# Altium PCB nfc-epd.PcbDoc (part 2 of 2)
Units mil, origin at the board's own origin, x right, y up, seen from the top; angles counter-clockwise.
Board outline 3332.68 x 2086.61 mil, 4 copper layers (Top Layer, Groud Plane, Signal 1, Bottom Layer); 142 components, 114 nets, 463 pads, 109 vias.
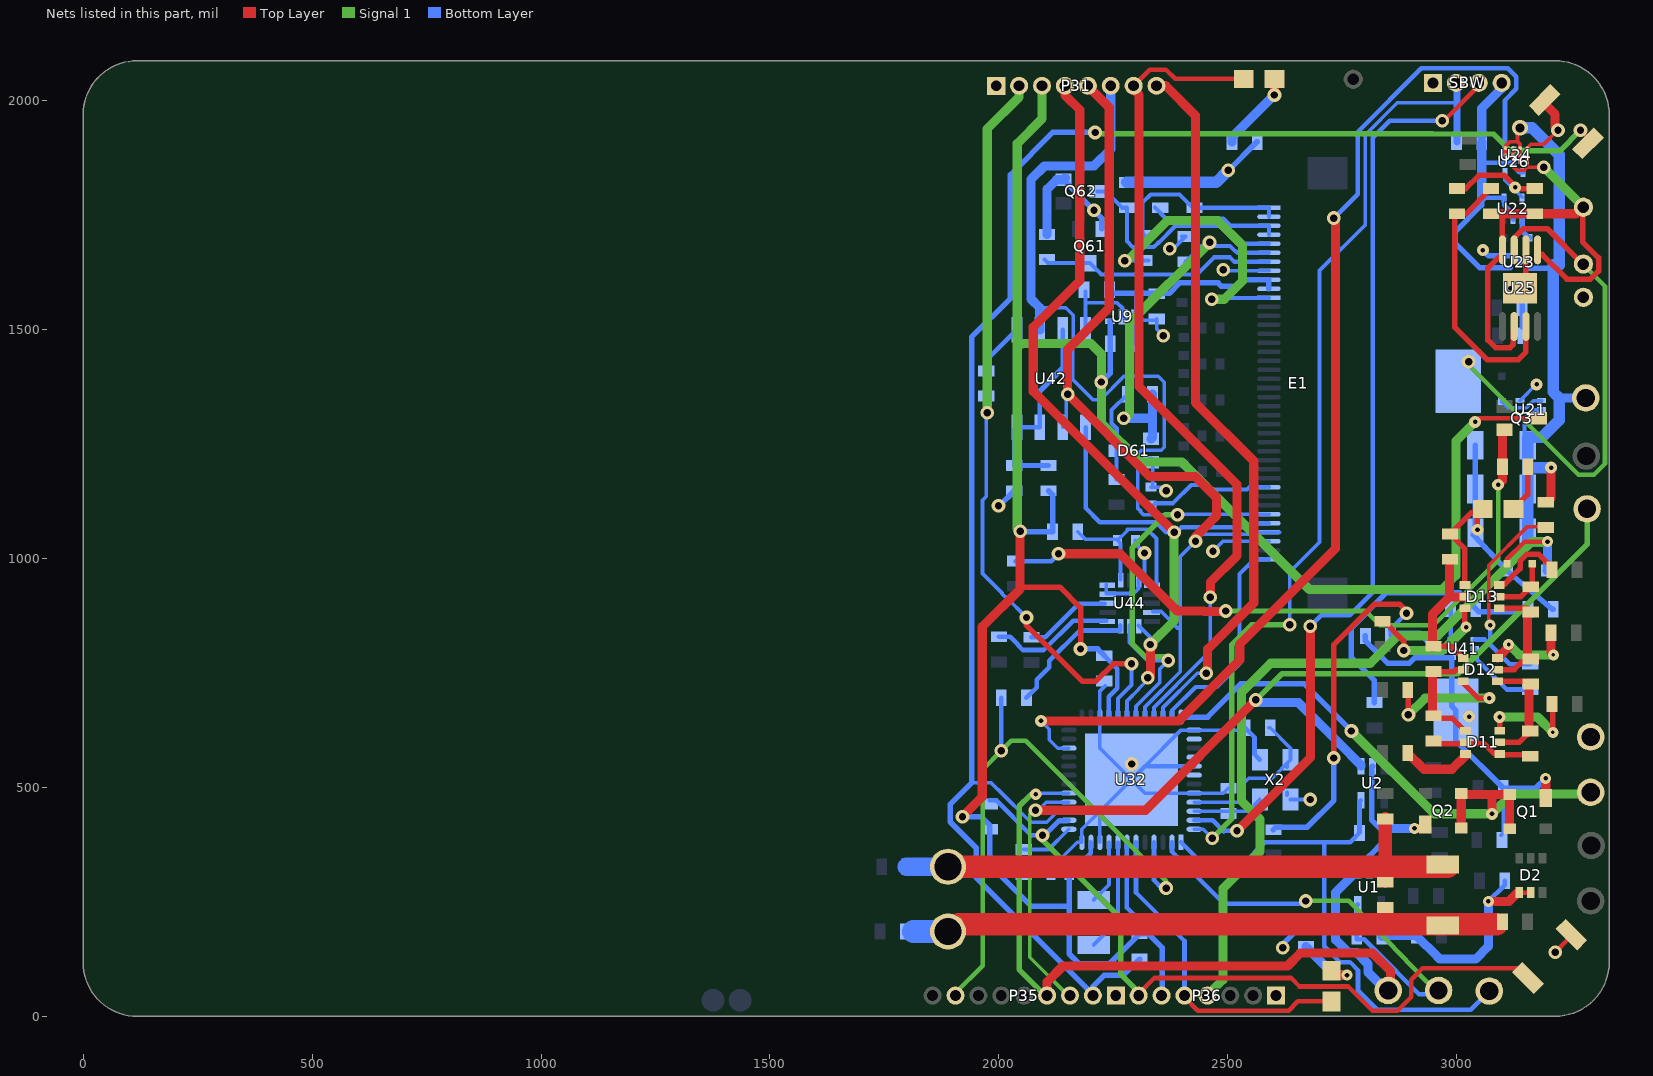
[diagram p4: the nets of this part, all layers, seen from the top]

## Via types
v1: diameter 30, hole 16, Top Layer to Bottom Layer, tented both sides, 74 vias
v2: diameter 26, hole 10, Top Layer to Bottom Layer, tented both sides, 21 vias
v3: diameter 24, hole 10, Top Layer to Bottom Layer, tented both sides, 7 vias
v4: diameter 24, hole 8, Top Layer to Bottom Layer, tented both sides, 3 vias
v5: diameter 50, hole 28, Top Layer to Bottom Layer, tented both sides, 3 vias
v6: diameter 34, hole 20, Top Layer to Bottom Layer, tented both sides, 1 vias

## Nets (pads, with @x,y where several pads share a name; then routed paths per layer and width w, separated by ;. In a path a pad name is that pad's centre, name@x,y a point inside that pad or via, vN(x,y) a via of type N, cw(c..) or ccw(c..) an arc to the next point about the centre after c; other vN are vias at no path point) (continued)
GND: B1.2 C6.2 C7.2 C8.2 C10.2 C20.1 C21.1 C22.1 C23.1 C24.1 C31.1 C32.2 C33.2 C34.1 C36.1 C41.1 C42.2 C61.2 C72.1 C73.1 C74.1 C75.1 C76.1 C78.1 C79.1 Cns3.1 D2.1 D2.2 D13.1 D24.2 D61.2 E1.3 E1.33 ESD1.1 GND0.0 GND1.0 P31.1 P35.1 P36.1 Q1.1 Q2.1 Q61.2 Q62.2 R2.2 R9.2 R21.1 R34.1 R35.1 R41.1 R44.1 R70.1 Rz23.2 S1.2 S2.2 SBW.1 U1.2 U2.2 U9.2 U9.5 U21.5 U22.5 U23.2 U23.5 U24.C1 U25.6 U25.9 U26.5 U32.0 U32.10 U32.12 U32.27 U32.37 U32.41 U32.44 U41.1 U42.4 U44.12 U44.13 U44.16 X2.2 X2.4 | length 6370.8
  Top Layer w8: U24.C1@3153.62,1895.75 3162.54,1904.67 3190,1904.67 3220.33,1935 v1(3220.94,1935) ; S2.2@3201.69,2001.07 S2.2@3201.69,2007.96
  Top Layer w10: D2.1@3135.83,270.22 D2.2@3161.42,270.22 ; v1(3214.57,140) 3244.57,170 3241.85,170 S1.2@3250.08,178.23
  Top Layer w12: Rz23.2@3000,1807.56 3019.24,1807.56 3048.1,1836.43 3103.57,1836.43 3132.44,1807.56 C24.1@3170,1807.56 ; D13.1@3017.72,941.93 3017.72,1020.26 Cns3.1@2984.83,1053.15 3031.68,1100 3048.47,1100 D24.2@3056.54,1108.06 ; v2(3045,1062.54) D24.2@3045,1090.55 ; U25.9@3137.87,1590 3150.67,1602.8 U25.6@3150.67,1673.66
  Top Layer w20: v3(2907.48,410.43) 2921.77,410.43 Q2.1@2930.63,419.29 ; v3(3068.9,250.98) 3113.76,250.98 D2.1@3132.46,269.69 ; S2.2@3191.85,2001.07 3191.85,1992.72 3214.57,1970 3214.57,1941.37 v1(3220.94,1935) ; Q1.1@3193.9,476.38 v3(3193.9,519.69)
  Bottom Layer w8: C32.2@2054.13,309.06 C36.1@2114.17,309.06 2114.17,322.82 2171.27,379.92 U32.12@2181.1,379.92 2181.1,408.46 U32.0@2220.47,447.83 ; U42.4@2189.17,1499.02 2189.17,1560 ; C78.1@2189.17,1583.46 2189.17,1560 ; U32.10@2220.47,379.92 U32.0@2220.47,447.83 ; C31.1@2231.47,721.46 2220.47,710.46 U32.27@2220.47,653.54 2220.47,585.63 U32.0@2289.37,516.73 ; U44.13@2234.25,942.91 2234.25,923.23 2294.1,923.23 2304.69,933.81 2304.69,953.74 2317.91,966.97 v1(2317.91,1011.81) 2298.23,1031.5 C42.2@2298.23,1039.37 ; C79.1@2298.23,1468.5 2298.23,1516.73 U9.2@2299.21,1517.72 ; U32.0@2318.9,546.26 2397.64,625 U32.37@2426.18,625 ; C61.2@2332.02,1155.51 C61.2@2335.63,1155.51 ; D61.2@2332.02,1218.43 D61.2@2332.02,1209.65 2335.63,1206.04 C61.2@2335.63,1155.51 ; R70.1@2344.49,1522.64 R70.1@2344.49,1519.69 ; v1(2359.06,1486.22) 2344.49,1500.79 R70.1@2344.49,1519.69 ; v1(2365,1147.64) 2357.13,1155.51 C61.2@2335.63,1155.51 ; v1@2374.02,1670.28 2375,1670.28 C74.1@2407.48,1702.76 C74.1@2399.61,1702.76 ; U32.37@2427.17,625 C34.1@2538.39,625 ; v1(2467.52,1015.75) 2489.17,1037.4 E1.3@2589.57,1037.4 ; C33.2@2500.98,498.03 2490.16,487.2 U32.44@2426.18,487.2 2318.9,487.2 U32.0@2289.37,516.73 ; v1@2501.48,1846.95 R34.1@2563.98,1909.45 ; v1@2502.95,1627.95 E1.33@2589.57,1627.95 ; X2.4@2628.94,483.27 X2.4@2628.94,489.54 ; X2.4@2636.81,473.43 v1(2680,473.43) ; R2.2@3096.46,395.67 3101.38,400.59 C6.2@3101.38,498.03 ; 3105,1832.76 3105,1825.85 U22.5@3142.54,1788.31 ; U21.5@3137.79,1344.49 3173.31,1380 v2(3174.21,1380) ; 2189.17,1560 2191.28,1557.9 2257.51,1557.9 2257.94,1558.32 2270.67,1545.59 U9.5@2270.67,1527.56 2278.54,1519.69 R70.1@2344.49,1519.69 ; U32.0@2220.47,447.83 U32.0@2289.37,516.73
  Bottom Layer w10: U32.0@2289.37,516.73 2318.9,546.26 U32.41@2426.18,546.26 ; C34.1@2537.4,629.92 2558.07,609.25 2558.07,571.85 X2.2@2569.88,560.04 ; v3(3068.9,250.98) 3104.33,286.42 R9.2@3104.33,296.26
  Bottom Layer w12: v1(1999.02,1115) 2000.83,1115 C41.1@2033.46,1147.64 ; Q62.2@2140.75,1826.77 2224.41,1743.11 Q61.2@2224.41,1719.49 ; v1(2500.98,1847.44) 2562.99,1909.45 R34.1@2563.98,1909.45 ; v1(2620,150) 2620,157.4 R35.1@2670.28,207.68 ; R41.1@2800.2,830.71 2800.2,819.88 2849.44,770.64 2895.48,770.64 2908.31,783.46 U41.1@2988.66,783.46 2988.66,677.68 B1.2@2998.03,668.31 2998.03,601.38 C6.2@3101.38,498.03 3172.24,498.03 v3(3193.9,519.69) ; U1.2@2809.06,318.9 2809.06,350.39 2842.52,383.86 C8.2@2842.52,400.59 2813.98,429.13 2813.98,544.29 U2.2@2815.94,546.26 ; C23.1@3040.35,1247.05 C22.1@3040.35,1151.57 C21.1@3040.35,1056.42 ; C21.1@3040.67,1056.1 C21.1@3040.35,1056.42 ; v2(3056.73,1673.23) 3069.53,1660.43 U23.2@3116.23,1660.43 3123.12,1660.43 U23.5@3135.91,1647.64 ; v2(3116.22,1590) v2@3116.22,1597.03 ; 3142.72,1505.91 3142.72,1573.19 v2(3159.53,1590) ; R44.1@3210.63,888.78 3207.99,888.78 3110,972.58 3036.19,1051.28 3045.88,1061.6 v2(3045,1062.54) C21.1@3040.35,1056.42
  Bottom Layer w20: C73.1@2105.12,1707.56 2105.12,1805.98 2125.91,1826.77 Q62.2@2140.75,1826.77 Q62.2@2144.94,1830.96 ; C7.2@2836.61,174.21 2838.58,176.18 C10.2@2911.42,176.18 2957.85,129.75 2962.6,125 3040.98,125 3068.9,152.92 v3(3068.9,250.98) ; C8.2@2842.52,400.59 2852.36,410.43 v3(2907.48,410.43)
  Bottom Layer w25: C75.1@2279.53,1820.87 C76.1@2352.36,1820.87 C72.1@2427.17,1820.87 2474.41,1820.87 v1(2500.98,1847.44)
  other v1: 2290,550.94 2490,1630 2372.81,1676.4 2207.52,1760
  other v2: 3026.57,654.53 3127.03,1810
LDOO: U32.42
LED1: D31.1 P31.7 U32.33 | length 1810.5
  Top Layer w10: P31.7@2294.09,2032.01 2329.31,2067.23 2364.71,2067.23 2384.7,2047.24 D31.1@2534.45,2047.24
  Top Layer w20: P31.7@2294.09,2032.01 2294.09,2023.82 2306,2011.91 2306,1375 2520,1161 2520,1006.23 2461.61,947.84 v1(2461.61,915.35)
  Bottom Layer w8: U32.33@2338.58,653.54 2338.58,674.52 2438.06,774 2438.13,774 2461.61,797.48 v1(2461.61,915.35)
LED2: D32.1 P36.5 U32.6 | length 729.1
  Top Layer w10: P36.5@2405.12,41.34 2433.91,12.55 2632.67,12.55 2652.6,32.48 D32.1@2726.38,32.48
  Bottom Layer w10: U32.6@2299.21,379.92 2299.21,270.39 2405.12,164.49 P36.5@2405.12,41.34
  Bottom Layer w12: P36.5@2405.12,41.34 P36.5@2410.31,41.34
NetC1_1: C1.1 C2.1 CV1.1 Rz_P.2 SMA1.1 | length 1319.5
  Top Layer w25: C1.1@2843.5,292.56 2843.5,326.61
  Top Layer w30: 2843.5,326.61 C2.1@2843.5,431.1
  Top Layer w50: SMA1.1@1888.78,326.61 2843.5,326.61 CV1.1@2980,326.61
  Bottom Layer w40: Rz_P.2@1799.01,326.61 SMA1.1@1888.78,326.61
NetC1_2: C1.2 C3.1 CV1.2 Rz_N.2 SMA1.2 | length 1330.7
  Top Layer w25: 2841.55,201.05 2841.55,235.48 C1.2@2843.5,237.44
  Top Layer w50: SMA1.2@1888.78,185.2 1895.2,185.2 1911.05,201.05 2841.55,201.05 3086.95,201.05
  Bottom Layer w50: 1813.15,185.2 SMA1.2@1888.78,185.2 SMA1.2@1879.51,194.46
NetC42_1: C42.1 Rz46.2 U44.1 U44.14 | length 391.8
  Bottom Layer w8: Rz46.2@2172.24,1058.07 2188.23,1042.09 2256.14,1042.09 C42.1@2258.86,1039.37 ; U44.14@2265.31,953.74 2265.31,1032.91 C42.1@2258.86,1039.37 ; U44.1@2343.91,938.98 2343.91,1043.17 2323.79,1063.3 2280,1063.3 2280,1060.51 C42.1@2258.86,1039.37
NetC77_2: C77.2 D61.3 Rz70.2 | length 205
  Bottom Layer w9: C77.2@2256.89,1172.24 2256.89,1234.91 D61.3@2257.22,1235.24 2257.22,1284.05 2246.14,1295.13 2246.14,1323.89 Rz70.2@2280.51,1358.27
NetCn1_2: Cn1.2 D11.6 | length 222.4
  Top Layer w12: D11.6@3093.5,624.02 v2(3093.5,653.54) ; Cn1.2@3207.68,682.09 3209.57,680.2 v4(3209.57,620)
  Signal 1 w20: v2(3093.5,653.54) 3176.02,653.54 v4(3209.57,620)
NetCn2_2: Cn2.2 D12.6 | length 196.8
  Top Layer w20: D12.6@3088.58,782.48 3113.19,807.09 v4(3113.19,812.01) ; Cn2.2@3205.63,837.6 3205.63,794.37 v4(3210.63,789.37)
  Signal 1 w20: v4(3113.19,812.01) 3135.83,789.37 v4(3210.63,789.37)
NetCn3_2: Cn3.2 D13.6 | length 171.6
  Top Layer w12: D13.6@3092.52,941.93 3102.36,941.93 3137.87,977.44 3137.87,994.41 3152.32,1008.86 3179.13,1008.86 Cn3.2@3212.6,975.39
NetCns1_1: Cns1.1 Cns2.2 D11.1 D12.2 | length 209.5
  Top Layer w12: Cns2.2@2948.82,752.95 2994.09,752.95 2998.03,756.89 D12.2@3013.78,756.89 ; Cns1.1@2959.65,650.59 2990.16,650.59 D11.1@3016.73,624.02
  Top Layer w20: Cns1.1@2946.85,663.39 2946.85,738.19
NetCns1_2: Cns1.2 Cps1.2 D11.2 D11.4 | length 207.3
  Top Layer w12: Cns1.2@2946.85,595.47 3059.06,595.47 3081.69,572.83 3097.19,570.87 Cps1.2@3144.69,570.87
NetCns2_1: Cns2.1 Cns3.2 D12.1 D13.2 | length 300.4
  Top Layer w12: Cns2.1@2948.82,808.07 2988.19,808.07 D12.1@3013.78,782.48
  Top Layer w20: Cns2.1@2946.85,805.12 2946.85,877.95 2984.83,915.93 D13.2@3017.72,915.93 ; 2984.25,915.35 2984.25,980.81
NetCp1_1: Cp1.1 D11.3 | length 151.5
  Top Layer w20: Cp1.1@2892.72,574.8 2928.13,539.39 2989.19,539.39 D11.3@3017.72,567.91
NetCp2_1: Cp2.1 D12.3 | length 312.6
  Top Layer w12: v1(2894.12,658.46) 2894.12,705.15 Cp2.1@2894.69,705.71 ; D12.3@3011.81,729.33 3046.26,694.88 v2(3070.87,694.88)
  Signal 1 w20: v1(2894.12,658.46) 2930.54,694.88 v2(3070.87,694.88)
NetCp3_1: Cp3.1 D13.3 | length 290.8
  Top Layer w12: Cp3.1@2831.69,864.17 2839.57,864.17 2883.89,819.85 v1(2883.89,798.64) ; D13.3@3017.72,890.75 3017.72,852.28 v3(3020,850)
  Signal 1 w20: v1(2883.89,798.64) 2968.64,798.64 v3(3020,850)
NetCps1_1: Cps1.1 Cps2.2 D11.5 D12.4 | length 253.8
  Top Layer w12: D12.4@3088.58,731.3 3155.51,731.3 Cps2.2@3161.42,725.39 ; D11.5@3093.5,598.43 3135.83,598.43 3157.48,620.08 Cps1.1@3160.43,623.03
  Top Layer w20: Cps1.1@3157.48,620.08 Cps2.2@3157.48,721.46
NetCps2_1: Cps2.1 Cps3.2 D12.5 D13.4 | length 251.2
  Top Layer w12: D12.5@3088.58,756.89 3125,756.89 3142.72,774.61 3155.51,774.61 Cps2.1@3161.42,780.51 ; D13.4@3092.52,890.75 3153.54,890.75 Cps3.2@3161.42,882.87
  Top Layer w20: Cps2.1@3154.53,779.53 Cps3.2@3154.53,875.98
NetCps3_1: Cps3.1 D3.1 D13.5 | length 129.3
  Top Layer w12: D13.5@3092.52,916.34 3139.76,916.34 Cps3.1@3161.42,937.99 3164.37,940.94 D3.1@3164.37,988.19
NetD21_1: D21.1 U21.1 | length 99.5
  Bottom Layer w8: D21.1@3097.83,1342.44 3097.83,1342.13 3110.8,1329.16 3123.63,1329.16 3123.81,1328.98 3151.78,1328.98 3157.64,1334.83 3157.64,1335.02 3161.42,1338.8 3161.61,1338.8 3167.29,1344.49 U21.1@3185.04,1344.49
NetD22_1: D22.1 U22.1 | length 46.2
  Bottom Layer w12: U22.1@3142.54,1740 3142.54,1715.02 D22.1@3157.56,1700
NetD24_1: D24.1 R24.2 | length 122.7
  Top Layer w12: D24.1@3123.46,1100 D24.1@3123.46,1117.9 ; D24.1@3123.46,1108.06 3154.59,1139.19 R24.2@3154.59,1200
NetD31_2: D31.2 R34.2 | length 176.2
  Top Layer w20: D31.2@2601.38,2047.24 2601.38,2012.04 v1(2601.5,2011.91)
  Bottom Layer w20: R34.2@2508.86,1909.45 2508.86,1919.26 v1(2601.5,2011.91)
NetD32_2: D32.2 R35.2 | length 153.2
  Top Layer w20: D32.2@2726.38,99.41 2735.79,90 v3(2760,90)
  Bottom Layer w20: R35.2@2670.28,152.56 2732.83,90 v3(2760,90)
NetQ3_2: Q3.2 R24.1 Rz22.2 | length 1476
  Top Layer w20: v1(2130,1010) 2264.46,1010 2389.46,885 2448.13,885 2448.77,884.35 2494.35,884.35 v1(2495,885) ; v2(3090.09,1160.69) 3099.48,1170.08 R24.1@3099.48,1200 3099.48,1276.06 Q3.2@3103.93,1280.51
  Signal 1 w10: v1(2495,885) 2801.13,885 2832.13,854 2949,854 3084.13,989.13 3090.09,995.09 v2(3090.09,1160.69)
  Bottom Layer w10: Rz22.2@2035.43,994.09 2114.09,994.09 v1(2130,1010)
NetR41_2: R41.2 Rz40.1 U41.2 | length 926.1
  Top Layer w12: v1(2731.3,563.98) 2731.3,811.69 2819.61,900 2874.61,900 2890,884.61 v1(2890,880)
  Bottom Layer w10: R41.2@2860.65,836.04 R41.2@2855.31,830.71 2855.31,843.5 2855.31,845.31 v1(2890,880) ; U41.2@2982.28,803.15 U41.2@2988.66,803.15
  Bottom Layer w12: Rz40.1@2599.41,407.48 2605.31,413.39 2673.23,413.39 2731.3,471.46 v1(2731.3,563.98) ; R41.2@2855.31,843.5 2862.78,836.04 2918.88,836.04 2951.77,803.15 U41.2@2982.28,803.15
NetR43_1: R43.1 R44.2 Rz41.2 | length 620.6
  Bottom Layer w12: Rz41.2@2819.88,685.04 2819.88,733.4 2769.69,783.6 2769.69,848.11 2846.58,925 3006.1,925 R43.1@3041.34,889.76 3047.24,883.86 3150.59,883.86 R44.2@3155.51,888.78
NetRz21_1: Rz21.1 Rz23.1 U25.3 | length 597.5
  Top Layer w12: Rz21.1@3074.72,1807.56 3019.61,1752.44 2995,1752.44 2995,1505 3065.82,1434.18 3134.18,1434.18 3150.67,1450.67 U25.3@3150.67,1506.34
NetRz45_2: Rz45.2 U42.1 | length 117.2
  Bottom Layer w10: Rz45.2@1972.44,1409.45 1972.44,1432.28 U42.1@2039.17,1499.02
NetRz47_2: Rz47.2 U44.8 | length 294.7
  Bottom Layer w10: Rz47.2@2060.04,695.87 2082.27,718.09 2082.27,734.6 2110,762.34 2110,776.34 2176.18,842.52 2265.31,842.52 U44.8@2265.31,853.35
NetRz48_1: Rz48.1 U44.9 | length 273.6
  Bottom Layer w10: Rz48.1@2000,828.74 2024.8,828.74 2041.15,812.39 2041.15,810.97 2052.12,800 2098.23,800 2162.4,864.17 U44.9@2234.25,864.17
NetRz49_1: Rz49.1 U44.11 | length 190.8
  Bottom Layer w10: Rz49.1@2070.87,827.76 2100.98,827.76 2173.99,900.76 U44.11@2231.47,900.76
PU.0: U32.38
PU.1: U32.40
RST: R31.1 SBW.2 U32.48 | length 2130.1
  Signal 1 w12: v1(2465.55,388.78) 2508.02,431.25 2508.02,810.95 2552.07,855 v1(2635,855)
  Bottom Layer w8: U32.48@2426.18,408.46 2445.87,408.46 v1(2465.55,388.78) ; v1(2635,855) 2635,970 2700,1035 2700,1628.54 2800.2,1728.74 2800.2,1925.2 2870,1995 3000,1995
  Bottom Layer w15: SBW.2@2997.83,2038.39 3000,2036.22 3000,1995 R31.1@3000,1909.04
RX: P35.4 RX.0 U1.1 U32.17 | length 1767.3
  Top Layer w20: P35.4@2105.12,45.34 2105.12,75.12 2140,110 2630,110 2658.06,138.06 2815.68,138.06 2855.31,98.43 RX.0@2855.31,70.87
  Signal 1 w12: v2(2080.45,485) 2084.14,485 2082.85,483.71 2069.11,483.71 2044.09,458.69 2044.09,102.36 P35.4@2105.12,41.34
  Bottom Layer w8: v2(2080.45,485) 2085.45,490 2090,485.45 2091.76,487.2 U32.17@2152.56,487.2
  Bottom Layer w20: U1.1@2783.46,318.9 2735.24,270.67 2735.24,166.9 2762.64,139.5 2780.86,139.5 2806,114.35 2806,96.14 2845.74,56.4 RX.0@2850,56.4
RX_ENABLE: C7.1 RX_EN.0 U1.5 U32.2 | length 1043.9
  Signal 1 w10: v1(2670,251.97) 2764.04,251.97 2768.96,247.05 2956.04,52.59 RX_EN.0@2960,48.47
  Bottom Layer w10: U32.2@2377.95,379.92 2377.95,359.25 2491.55,245.65 2663.69,245.65 v1(2670,251.97) ; U1.5@2783.46,244.09 2781.5,242.13 C7.1@2781.5,174.21 2781.5,168 2797.79,168 2813.8,151.99 2813.8,151.94 2820.25,145.5 2820.3,145.5 2917.32,48.47 RX_EN.0@2960,48.47
RX_P4.5: P31.8 U32.34 | length 1571.9
  Top Layer w20: P31.8@2344.09,2032.01 2364.09,2032.01 2429,1967.11 2429,1340.2 2556.45,1212.75 2556.45,902.61 2455.79,801.95 2455.79,752 v1(2452.81,749.02)
  Bottom Layer w8: U32.34@2358.27,653.54 2358.27,674.41 2432.87,749.02 v1(2452.81,749.02)
RX_WAKEUP: P35.3 RX_WakeUp.0 U2.1 U32.16 | length 2345.9
  Top Layer w20: v1(2080,450) 2320.08,450 v1(2561.02,690.94)
  Signal 1 w8: v1(2080,450) 2075,450 2067.46,442.46 2067.46,129 P35.3@2155.12,41.34
  Signal 1 w12: v1(2561.02,690.94) 2618.11,748.03 3001.89,748.03 3284.21,1030.35 RX_WakeUp.0@3284.21,1108.06
  Bottom Layer w8: v1(2080,450) 2085.91,450 2103.43,467.52 U32.16@2152.56,467.52
  Bottom Layer w20: v1(2561.02,690.94) 2566.93,685.04 2654.08,685.04 2744.14,594.98 2790.35,548.76 U2.1@2790.35,546.26
RX_WAKEUP_ENABLE: C8.1 RX_WakeUp_EN.0 U2.5 U32.1 | length 1196.8
  Bottom Layer w10: U32.1@2397.64,379.92 2443.9,333.66 2534.21,333.66 2580.47,379.92 2710,379.92 ; U2.5@2790.35,471.46 2787.4,468.5 C8.1@2787.4,400.59 2766.73,379.92 2710,379.92 ; RX_WakeUp_EN.0@3070.87,55.12 3030.15,14.4 2826.45,14.4 2784,56.85 2784,101 2766.5,118.5 2744.34,118.5 2710,152.83 2710,379.92
SPI_CLK: E1.4 P31.5 U32.32 U42.6 U44.4 | length 2031
  Top Layer w20: P31.5@2194.09,2032.48 P31.5@2194.09,2032.01 2194.09,2031.55 2241,1984.64 2241,1547.09 2150,1456.09 v1(2150,1358.15) 2329.51,1178.64 2429.18,1178.64 2475.01,1132.81 2475.01,1093.26 2429.13,1047.38 v1(2429.13,1037.4)
  Bottom Layer w8: U42.6@2139.17,1286.42 2146.65,1293.9 v1@2146.65,1359.25 ; U32.32@2318.9,653.54 2318.9,675.35 2396,752.45 2396,1004.27 v1(2429.13,1037.4) 2444.13,1052.4 2561.38,1052.4 2566.07,1057.09 E1.4@2613.19,1057.09 ; U44.4@2335.63,883.86 2354.2,883.86 2389.95,848.11
SPI_CS_ACCEL: P35.8 Rz47.1 U32.4 | length 1323.5
  Signal 1 w10: P35.8@1905.12,41.34 1905.12,51.57 1964.28,110.73 1964.28,539.08 v1(2004.92,579.72) 2026.95,601.76 2058.36,601.76 2365,295.11 v1(2365,280)
  Bottom Layer w10: v1(2004.92,579.72) Rz47.1@2004.92,695.87 ; U32.4@2338.58,379.92 2338.58,297.13 2355.72,280 v1(2365,280)
SPI_CS_EPD: E1.1 U32.35 | length 477.5
  Bottom Layer w9: U32.35@2377.95,653.54 2377.95,667.72 2429.72,719.49 2475.57,719.49 2525.59,769.51 2525.59,965.55 2558.07,998.03 E1.1@2589.57,998.03
SPI_CS_MEM: P31.2 Rz45.1 U32.29 | length 1712.4
  Top Layer w12: v1(2060.04,871.06) 2060.04,853.47 2182.21,731.3 2211.3,731.3 2249.69,769.69 v1(2289.37,769.69)
  Signal 1 w20: v1(1974.41,1317.91) 1974.41,1937.95 2044.09,2007.64 P31.2@2044.09,2032.01
  Bottom Layer w8: Rz45.1@1972.44,1354.33 1972.44,1135.35 1964,1126.91 1964,967.1 2006.72,924.39 2006.72,922.61 2013.16,916.17 2014.94,916.17 v1(2060.04,871.06) ; U32.29@2259.84,653.54 2259.84,693.9 2289.37,723.43 v1(2289.37,769.69)
SPI_MISO: E1.6 P31.6 U32.31 U42.2 U44.7 | length 2491.7
  Signal 1 w12: v1(2370,776.9) 2361.89,785.01 2319.52,785.01 2290.91,813.62 2290.91,1022.99 2362.92,1095 v1(2390,1095)
  Bottom Layer w8: 2089.17,1547.24 2145.87,1547.24 2161.98,1531.13 2161.98,1466.9 2160.91,1465.82 2160.91,1390.82 2205.27,1346.46 2222.03,1346.46 2273.21,1397.64 2347.97,1397.64 2360.74,1384.87 2360.74,1242.49 2354.29,1236.05 2311.37,1236.05 2303.3,1227.98 2303.3,1109.06 2304.83,1107.54 2306.25,1107.54 2309.21,1104.57 2309.21,1101.74 2315.65,1095.3 2348.39,1095.3 2349.39,1096.3 2350.69,1095 v1(2390,1095) ; U44.7@2285,853.35 2285,815.83 2323.93,776.9 v1(2370,776.9) 2350.8,757.7 2350.8,728.4 2299.21,676.81 U32.31@2299.21,653.54 ; v1@2400.98,1096.06 2589.17,1096.06 E1.6@2589.57,1096.46
  Bottom Layer w10: 2076.4,1560.02 2089.17,1547.24
  Bottom Layer w20: U42.2@2089.17,1499.02 2089.17,1547.24 2070,1566.42 2070,1827.53 2099.43,1856.96 2207.43,1856.96 2244.09,1893.62 P31.6@2244.09,2032.01
SPI_MOSI: E1.5 P31.4 U32.30 U42.5 U44.6 | length 2263
  Top Layer w20: P31.4@2144.09,2032.01 2144.09,2011.81 2176.52,1979.38 2176.52,1606.52 2075,1505 2075,1364.63 v1(2382.54,1057.09) ; v1(2324.8,739.17) 2330.71,745.08 v1(2330.71,812.01)
  Signal 1 w20: v1(2330.71,812.01) 2382.54,863.84 v1(2382.54,1057.09)
  Bottom Layer w8: U32.30@2279.53,653.54 2279.53,688.41 2305.37,714.25 2305.37,715.57 2324.8,735 v1(2324.8,739.17) ; U44.6@2304.69,853.35 2330.71,827.32 v1(2330.71,812.01)
  Bottom Layer w9: v1(2382.54,1057.09) 2387.61,1057.09 2398.42,1067.9 2554.96,1067.9 2563.83,1076.77 E1.5@2589.57,1076.77
  Bottom Layer w10: U42.5@2189.17,1286.42 2189.17,1110.04 2219.91,1079.3 2343.5,1079.3 2365.72,1057.09 v1(2382.54,1057.09)
SW_1: P36.7 R37.1 S1.1 U32.14 | length 1696.8
  Top Layer w10: P36.7@2305.12,41.34 2305.12,49.36 2339.33,83.58 2637.92,83.58 2656.37,65.13 2763.16,65.13 2815.75,12.55 2870.29,12.55 2900,42.26 2900,80 2925,105 3134.01,105 S1.1@3155.43,83.58
  Signal 1 w12: v1(2095,395.67) 2095,385 2265.6,214.4 2265.6,92.8 2305.12,53.28 P36.7@2305.12,41.34
  Bottom Layer w10: R37.1@1980.31,471.46 1994.09,471.46 2069.88,395.67 v1(2095,395.67) v1@2098.87,395.67 ; v1@2098.87,395.67 2100.28,395.67 2130.59,425.98 2150.39,425.98 U32.14@2152.56,428.15 2131.35,428.15 v1@2098.87,395.67
SW_2: P35.2 R38.1 S2.1 U32.15 | length 3736.7
  Top Layer w8: v1(3270,1935) 3286.5,1918.5 S2.1@3286.5,1906.41
  Signal 1 w12: v1@2210,1927.35 2946.49,1927.35 2947.14,1926.7 3080.17,1926.7 3116.88,1890 3225,1890 v1(3270,1935) v1@3263.91,1935
  Bottom Layer w8: 1940.15,509.9 1982.82,509.9 1997.64,495.08 1998.15,495.08 2069.23,424 2104.57,424 2128.4,447.83 U32.15@2152.56,447.83
  Bottom Layer w12: P35.2@2205.12,45.34 P35.2@2205.12,51.57 ; v1(2210,1930) 2117.27,1930 2024.8,1837.53 2024.8,1567.83 1940.15,1483.18 1940.15,509.9 1893.28,463.02 1893.28,424.84 1950,368.12 1950,302.82 2203.18,49.64 P35.2@2205.12,51.57 ; R38.1@2307.09,125 2272.09,90 2230.47,90 2205.12,64.65 P35.2@2205.12,51.57
TEST: SBW.3 U32.47 | length 2071.6
  Top Layer w10: v1(2968.19,1955.79) 2971.84,1955.79 3054.44,2038.39 SBW.3@3047.83,2038.39
  Top Layer w20: v1(2520,405) 2680,565 v1(2680,851.82)
  Bottom Layer w10: U32.47@2426.18,428.15 2466.54,428.15 2491.14,403.54 2492.6,405 v1(2520,405) ; v1(2680,851.82) 2703.98,875.8 2765.8,875.8 2816.2,926.19 2816.2,1918.57 2853.41,1955.79 v1(2968.19,1955.79)
TX: Q1.3 Q1.4 Q2.3 Q2.4 TX.0 U32.36 | length 1335.4
  Top Layer w20: Q2.4@3009.37,409.45 3009.37,484.25 3075.79,484.25 ; v2(3076.77,442.19) 3076.77,483.27 3075.79,484.25 ; Q1.3@3115.16,409.45 Q1.4@3115.16,484.25 3075.79,484.25
  Signal 1 w20: v1(2769.69,623.03) 2950.53,442.19 v2(3076.77,442.19) 3119.82,485.24 TX.0@3269.49,485.24
  Bottom Layer w12: U32.36@2397.64,653.54 2455.71,653.54 2528.54,726.38 2666.34,726.38 v1(2769.69,623.03)
VBATT: B1.1 U25.7 Vbatt.0 | length 1074.3
  Top Layer w12: v1(3025.59,1429.13) v1@3028.35,1431.9 ; U25.7@3126.08,1689.39 3126.08,1700.8 3145.28,1720 3197.32,1720 Vbatt.0@3274.61,1642.72
  Signal 1 w10: v1(3025.59,1429.13) 3025.59,1422.33 3265.5,1182.43 3299.46,1182.43 3323.48,1206.44 3323.48,1593.84 Vbatt.0@3274.61,1642.72
VBATT_DIV: R43.2 U41.3 | length 67.9
  Bottom Layer w10: R43.2@2986.22,889.76 2986.22,825.28 U41.3@2988.66,822.83
VBATT_GATE1: R42.2 U41.5 U41.6 | length 170.2
  Bottom Layer w10: U41.5@3038.9,803.15 U41.6@3038.9,783.46 3108.78,713.58 R42.2@3160.43,713.58
VBATT_SENSE: R42.1 Rz43.2 U41.4 | length 482.2
  Top Layer w8: v3(3072.83,854.33) 3069.71,857.46 3069.71,985.18 3153.27,1068.74 Rz43.2@3197.83,1068.74
  Bottom Layer w10: U41.4@3038.9,822.83 3060.98,822.83 3072.83,810.98 ; v3(3072.83,854.33) 3072.83,810.98 ; R42.1@3160.43,768.7 3115.11,768.7 3072.83,810.98
VCL: C61.1 E1.9 | length 278.9
  Bottom Layer w9: C61.1@2335.63,1114.17 2341.96,1120.5 2380.5,1120.5 2420,1160 2441.45,1160 2450.95,1150.5 2542.07,1150.5 2547.08,1155.51 E1.9@2589.57,1155.51
VCOM: C72.2 E1.39 E1.40 R62.2 | length 379.9
  Bottom Layer w9: R62.2@2317.91,1705.71 2313.38,1710.24 2313.38,1738.76 2313.52,1738.91 2313.52,1777.03 2331.49,1795 2393.98,1795 C72.2@2419.29,1769.69 ; C72.2@2427.17,1767.72 2429.13,1765.75 E1.40@2589.57,1765.75 E1.39@2589.57,1746.06
VCOM_DRIVER: E1.30 R62.1 | length 661
  Signal 1 w20: v1(2275,1650) 2280.11,1650 2367.77,1737.66 2477.46,1737.66 2532,1683.12 2532,1605.84 2492.1,1565.94 v1(2464.67,1565.94)
  Bottom Layer w9: v1(2275,1650) 2280.11,1650 2280.7,1650.59 R62.1@2317.91,1650.59 R62.1@2326.86,1650.59 ; v1(2464.67,1565.94) 2464.67,1568.62 2469.94,1573.9 2474.94,1568.9 E1.30@2589.57,1568.9
VCORE: C32.1 U32.13 | length 116.8
  Bottom Layer w8: C32.1@2054.13,364.17 2108.27,364.17 U32.13@2152.56,408.46
VDD: C41.2 Rz44.2 U42.3 U42.7 U42.8 | length 444.1
  Bottom Layer w10: 2089.17,1365.16 U42.7@2089.17,1286.42 U42.8@2039.17,1286.42 2033.46,1280.71 C41.2@2033.46,1202.76 Rz44.2@2108.27,1202.76 ; 2139.17,1415.16 U42.3@2139.17,1499.02
  Bottom Layer w12: 2089.17,1365.16 2139.17,1415.16
VDD_EPD: C78.2 E1.31 E1.32 R70.2 U9.1 | length 431.3
  Bottom Layer w12: C78.2@2241.14,1586.61 2249.02,1578.74 2300.76,1578.74 ; U9.1@2299.21,1537.4 2300.76,1538.94 2300.76,1578.74 ; E1.31@2589.57,1588.58 E1.32@2589.57,1608.27 2535.43,1608.27 2521.65,1594.49 2485.44,1594.49 2478.55,1601.38 2394.69,1601.38 2372.05,1578.74 2300.76,1578.74
VDH: C75.2 E1.36 Q62.3 | length 502.3
  Bottom Layer w9: Q62.3@2215.55,1801.18 2233.27,1801.18 2268.7,1765.75 C75.2@2279.53,1765.75 2279.53,1692.58 2292.11,1680 2338,1680 2347.13,1689.13 2348.07,1689.13 2385,1726.07 2483.14,1726.07 2522.2,1687.01 E1.36@2589.57,1687.01
VDL: C76.2 E1.37 E1.38 | length 285.9
  Bottom Layer w9: C76.2@2340.51,1765.89 2365.33,1741.07 2377.37,1741.07 2378.37,1742.07 2489.77,1742.07 2505.45,1726.38 E1.38@2589.57,1726.38 E1.37@2589.57,1706.69
VGH: C73.2 E1.34 Q61.3 | length 523.3
  Bottom Layer w9: C73.2@2099.41,1652.56 2107.28,1644.69 Q61.3@2198.82,1644.69 2223.53,1619.98 2432.08,1619.98 2469.58,1657.48 2504.92,1657.48 2514.76,1647.64 E1.34@2589.57,1647.64
VGL: C74.2 D61.1 E1.35 Rz70.1 | length 830.1
  Signal 1 w20: v1@2273.62,1303.15 2285,1314.53 2285,1514.33 2460,1689.33 v1(2460,1690)
  Bottom Layer w9: C74.2@2407.48,1647.64 2441.93,1682.09 2504.49,1682.09 2515.57,1671.01 2516.98,1671.01 2520.67,1667.32 E1.35@2589.57,1667.32
  Bottom Layer w20: v1(2272.64,1306.1) 2331.69,1306.1 2335.63,1310.04 ; D61.1@2332.02,1260.83 2335.63,1264.44 2335.63,1310.04 ; Rz70.1@2335.63,1358.27 2335.63,1310.04
VIN_CHARGE: C24.2 Rz21.2 U24.A1 U24.A3 U24.B1 U24.B3 U24.C3 U25.2 U25.5 U25.8 Vin_charge.0 | length 1157.3
  Top Layer w8: U24.C3@3122.13,1895.75 U24.B3@3122.13,1880 U24.A3@3122.13,1864.25 3122.13,1855.32 3130,1847.44 3147.08,1847.44 3153.62,1853.98 ; U24.B1@3153.62,1880 U24.A1@3153.62,1864.25 3153.62,1853.98 ; v1(3189.96,1853.98) 3153.62,1853.98
  Top Layer w12: U25.8@3097.44,1663.66 3067.91,1634.13 3067.91,1476.81 3084.72,1460 3116.22,1460 3123.03,1466.81 U25.2@3123.03,1496.34 ; U25.8@3099.49,1673.66 3099.49,1751.93 3100,1752.44 ; U25.5@3176.26,1663.66 3186.34,1663.66 3240.28,1609.72 3291.62,1609.72 3309.28,1627.37 3309.28,1656.39 3274.61,1691.06 Vin_charge.0@3274.61,1766.73
  Top Layer w20: Rz21.2@3074.72,1752.44 3100,1752.44 C24.2@3170,1752.44 3260.31,1752.44 Vin_charge.0@3274.61,1766.73
  Signal 1 w20: v1(3189.96,1853.98) 3274.61,1769.34 Vin_charge.0@3274.61,1766.73
VRECT: C21.2 C22.2 C23.2 D3.2 ESD1.2 P36.4 Rz43.1 U21.2 U21.4 U23.4 U24.A2 U24.B2 U24.B4 U24.C2 U24.C4 VRECT.0 | length 3290.8
  Top Layer w8: U24.B4@3106.38,1880 U24.C4@3106.38,1895.75 3106.38,1900.27 3116.19,1910.08 3132.46,1910.08 ; U24.A2@3137.87,1864.25 U24.B2@3137.87,1880 U24.C2@3137.87,1895.75 3137.87,1904.67 3132.46,1910.08 ; v6(3137.87,1940) 3132.46,1934.59 3132.46,1910.08
  Top Layer w10: D3.2@3109.25,988.19 3109.25,998.03 3147.64,1036.42 v3(3197.83,1036.42)
  Top Layer w20: Rz43.1@3197.83,1123.86 3205.63,1131.65 v2(3205.63,1198.01)
  Signal 1 w20: 2469.43,60.12 2488.93,79.62 2488.93,278.93 2570,360 2570,430 2530.02,469.98 2530.02,707.55 2593.51,771.03 2810.85,771.03 2870.82,831 2958.24,831 3163.66,1036.42 v3(3197.83,1036.42)
  Bottom Layer w8: U21.4@3137.79,1305.12 U21.4@3147.54,1305.12 ; C23.2@3154.53,1247.05 3147.54,1254.04 U21.4@3147.54,1305.12 ; U21.2@3185.04,1324.8 3167.4,1324.8 3157.58,1314.98 3157.39,1314.98 U21.4@3147.54,1305.12
  Bottom Layer w12: U23.4@3155.6,1633.86 3217.32,1633.86 3210,1641.18 ; VRECT.0@3281.1,1350 3281.89,1350 VRECT.0@3281.5,1350.39
  Bottom Layer w20: C21.2@3154.84,1038.39 3156.81,1036.42 v3(3197.83,1036.42) 3197.83,974.41 ESD1.2@3196.85,973.43 ; C22.2@3154.84,1151.26 3154.84,1198.01 ; 3223.46,1350 3281.1,1350 VRECT.0@3281.5,1350.39
  Bottom Layer w25: v6(3137.87,1940) 3164.57,1940 3223.46,1881.11 3223.46,1640 ; C22.2@3154.53,1151.57 C23.2@3154.53,1247.05 3154.53,1264.44 3185.87,1264.44 3223.46,1302.02 3223.46,1350 3210,1363.46 3210,1641.18 ; C21.2@3154.84,1038.39 C21.2@3154.84,1056.1 C22.2@3154.84,1151.26 ; 3154.84,1198.01 v2(3205.63,1198.01)
VRECT_LOW: U26.1 U32.22 | length 2439.6
  Top Layer w20: v2(2091.76,645) 2392.63,645 2526,778.37 2526,812.57 2735.24,1021.81 v1@2735.24,1740.28
  Bottom Layer w8: v2(2091.76,645) 2110,626.76 2110,603.97 2128.34,585.63 U32.22@2152.56,585.63
  Bottom Layer w10: v1(2731.39,1743.03) 2783.46,1795.1 2783.46,1931.09 2922.44,2070.07 2972.49,2070.07 2972.56,2070 2984.64,2070 2984.71,2070.07 3010.96,2070.07 3011.03,2070 3034.64,2070 3034.71,2070.07 3060.96,2070.07 3061.03,2070 3084.64,2070 3084.71,2070.07 3110.96,2070.07 3129.52,2051.51 3129.52,2025.26 3105,2000.74 3105,1880
VREG: C31.2 C36.2 C79.2 P31.3 P36.6 Q3.3 R31.2 R37.2 R38.2 Rz44.1 Rz46.1 SBW.4 U9.3 U22.2 U22.4 U23.1 U26.2 U26.4 U32.7 U32.11 U32.28 | length 6235.3
  Top Layer w10: v2(3040,1298.23) 3047.87,1306.1 Q3.3@3178.73,1306.1
  Top Layer w12: 2046.26,937.01 2132.99,937.01 2178.15,891.85 v1(2178.15,802.17)
  Top Layer w15: SBW.4@3097.83,2038.39 SBW.4@3100.39,2035.83
  Top Layer w20: v1(1920.28,436.02) 1963.58,479.33 1963.58,850.56 2046.26,933.24 2046.26,937.01 v1(2046.26,1059.06)
  Signal 1 w20: v1(2046.26,1059.06) 2040,1065.31 2040,1459.78 ; P31.3@2094.09,2032.01 2094.09,1959.88 2040,1905.79 2040,1459.78 ; P31.3@2094.29,2032.01 P31.3@2094.29,2032.48 ; v2(3040,1298.23) 2997.83,1256.06 2997.83,1227.17 2997.83,962.83 2966.82,931.82 2834.5,931.82 2834.32,932 2678,932 2399.47,1210.53 2309.58,1210.53 2223.58,1296.53 v1(2223.58,1385) 2223.58,1446.42 2200.96,1469.04 2049.26,1469.04 2040,1459.78
  Bottom Layer w10: C36.2@2153.54,309.06 2200.79,356.3 U32.11@2200.79,379.92 ; C31.2@2230,787.56 2258.72,758.84 2258.72,716.07 2240.16,697.51 U32.28@2240.16,653.54 ; U32.7@2279.53,379.92 2279.53,237.2 2307.09,209.65 R38.2@2307.09,180.12 ; 3054.13,1787.24 U22.4@3103.17,1787.24 3103.17,1770.91 3122.85,1751.23 U22.2@3122.85,1740 ; R31.2@3054.13,1909.45 3056.73,1906.85 3056.73,1860 3060.73,1864 3117.95,1864 3124.69,1870.74 ; U26.2@3124.69,1890 3124.69,1870.74 ; U26.4@3144.37,1842.76 3135.91,1842.76 3124.69,1853.98 3124.69,1870.74
  Bottom Layer w12: v1(1920.28,436.02) 1960.63,436.02 1980.31,416.34 1980.31,330.28 2070.6,240 2153.54,240 ; v1@2045.28,1058.07 Rz46.1@2117.13,1058.07 2117.13,1138.78 Rz44.1@2108.27,1147.64 ; C36.2@2153.54,309.06 2153.54,240 ; v1(2178.15,802.17) 2215.39,802.17 C31.2@2230,787.56 ; v1@2216.38,1377.95 2243.11,1404.69 C79.2@2243.11,1468.5 2243.11,1516.73 U9.3@2242.13,1517.72 ; P36.6@2355.12,41.34 2356.42,42.64 2356.42,150 2326.31,180.12 R38.2@2307.09,180.12 2241.97,115 2174.83,115 2153.54,136.29 2153.54,240 ; 3054.13,1787.24 3054.13,1771.21 2995,1712.07 2995,1689.65 3049.8,1634.84 U23.1@3116.23,1634.84
  Bottom Layer w20: 3054.13,1787.24 R31.2@3054.13,1909.45 ; R31.2@3054.13,1921.84 3054.13,1982.74 3097.83,2026.44 SBW.4@3097.83,2038.39
XIN: U32.8 X1.1 | length 246.4
  Bottom Layer w8: X1.1@2206.69,155.51 2259.84,208.66 U32.8@2259.84,379.92
XOUT: U32.9 X1.2 | length 139.8
  Bottom Layer w8: X1.2@2206.69,253.94 2240.16,287.4 U32.9@2240.16,379.92
XT2_IN: C34.2 U32.45 X2.3 | length 367
  Bottom Layer w8: U32.45@2426.18,467.52 2527.52,467.52 2535.43,475.43 2535.43,510 2545.43,520 2596.77,520 X2.3@2636.81,560.04 2636.81,585.63 C34.2@2592.52,629.92 C34.2@2589.19,629.92 ; X2.3@2628.94,543.93 X2.3@2628.94,550.2
XT2_OUT: C33.1 U32.46 X2.1 | length 154.3
  Bottom Layer w8: U32.46@2426.18,447.83 2544.29,447.83 X2.1@2569.88,473.43
pads on no net: E1.0 E1.8 U21.3 U22.3 U25.1 U26.3 U32.39 U32.43 U44.2 U44.3 U44.5 U44.10 U44.15

## Polygon pours and split planes (outlines as drawn)
VREG on Signal 1 "Signal 1-No Net" (solid, remove dead copper, pour order 2): 3112.35,2086.98 1876.98,2086.98 1840,2050 1840,10.23 2495,10.23 2495,900 3002.97,900 3130.94,952.76 3138.35,2060.81
GND on Groud Plane (split plane): 3229.95,2065.61 3244.95,2062.01 3259.2,2056.1 3272.36,2048.04 3284.09,2038.02 3294.11,2026.29 3302.17,2013.14 3308.07,1998.89 3311.63,1984.08 3312.58,1967.91 3312.95,118.9 3311.67,102.73 3308.07,87.73 3302.17,73.48 3294.11,60.32 3284.09,48.59 3272.36,38.57 3259.2,30.51 3244.95,24.61 3230.14,21.05 3213.97,20.1 1840,19.93 1840,2066.72 3213.78,2066.88

## Keep-outs
Keep-Out Layer:
  lines w10: 2850,968.72 ccw(c2860.81,968.08) 2860.17,957.27 2870.35,957.27 2911.04,957.27 ; 2850,970 2850,967.45 2850,1900 cw(c2860,1900) 2860,1910 2921.38,1910 ; 2900,957.27 2921.21,957.27 ccw(c2919.93,968.72) 2931.38,970 2931.38,977.62 2931.38,1900 ccw(c2920.69,1899.31) 2920,1910 ; 3342.51,113.72 cw(c3218.79,113.72) 3218.79,-10 110.02,-10 cw(c110.02,109.99) -9.97,109.99 -9.97,123.11 -10,123.14 -10,1960 -10,1972.81 -10.65,1973.46 cw(c112.51,1973.46) 112.51,2096.62 3212.71,2096.62 cw(c3212.71,1966.65) 3342.68,1966.65 3342.68,113.72
Mechanical 3:
  lines w10: 2850,970 ccw(c2862.73,970) 2862.73,957.27

## Other copper
Signal 1:
  pour cut-out: 2235.66,410 2235.66,409.34 2378.99,266.01 2333.9,220.92 2333.9,66.45 2236.99,66.45 2235.66,67.77
  pour cut-out: 2235.66,1185.91 2175.78,1185.91 2175.78,840.55 2235.66,840.55
  pour cut-out: 1999.02,760 1999.02,648.61 1947.28,596.87 1947.28,544.48 1950,541.75 1947.28,539.03 1947.28,225.22 2228.58,225.22 2230.12,226.26 2235.66,239.98 2235.66,760
  pour cut-out: 1936.06,382.13 1830,382.13 1830,10.07 1936.06,10
  pour cut-out: 3132.51,1187.38 3084.13,1187.38 3084.13,989.13 3132.23,989.13 3133.1,990
  pour cut-out: 3137.74,1977.77 2943.61,1977.77 2943.59,1344.11 3135.83,1344.11
Groud Plane (plane layer: these items are gaps in the copper):
  pour cut-out: 12.55,2085.52 1840,2085.63 1840,-1.97 1780.51,-1.97 -1.97,-1.97
  lines w10: 2840.55,1915.35 2942.76,1915.35

## Silkscreen, mask and mechanical layers (free items; w line width, h text height)
Top Overlay:
  lines w10: 1830,5.91 2282.48,5.91 ; 1830,80 2643.7,76.77 ; 1830.47,1.97 1830.47,2081.69 ; 2281.5,66.93 2281.5,72.83 ; 2282.48,13.78 2282.48,5.91 ; 2639.09,5.91 2282.48,5.91 ; 2645,5.43 2645,1950 ; 2893.03,890.75 2893.03,943.9 ; 2893.03,1918.7 2893.03,1964.57
Bottom Overlay:
  lines w10: 1751.3,4.92 1751.3,2080.71 ; 2457.09,942.91 2552.17,942.91 ; 2893.03,885.83 2893.03,941.93 ; 2893.03,1920.28 2893.03,1965.55
  lines w40: 658.86,534 658.86,1630.65
  text "Disney Research Pittsburgh" at 938.26,1646.35 h60 r90
  text "Yi Zhao, Alanson Sample  - 10/25/2014" at 1126.97,1619.65 h30 r90
  text "NFC-WISP_1.0" at 482.28,1369.41 h60 r90
Mechanical 1:
  region: 8.99,228.35 8.99,328.35 -5.91,328.35 -5.91,228.35
  region: 800,0 800,9.84 700,9.84 700,0
  lines w9.84: 3213.58,2096.55 cw(c3213.58,2086.61) 3214.07,2096.54 cw(c3214.57,2086.61) 3214.57,2096.55 ; -9.94,118.14 ccw(c-5.02,118.11) -9.94,118.11 cw(c0,118.11) -9.94,118.15 ; -9.94,118.17 ccw(c0,118.11) -9.94,118.15 ; -9.94,118.14 ccw(c-5.01,118.14) -9.94,118.14 ; -9.94,118.14 -9.94,118.15 ; -9.94,118.14 -9.94,118.14
  text "TEST" at 3033.74,2229.06 h30 r270
  text "VREG" at 3083.74,2229.06 h30 r270
  text "GND" at 2933.74,2199.07 h30 r270
  text "RST" at 2983.74,2199.07 h30 r270
  text "VREG" at 2100,2120 h30 r90
  text "P4.2 / SPI_MISO" at 2260,2120 h30 r90
  text "P4.4 / LED1" at 2310,2120 h30 r90
  text "P4.5 / RX_P4.5" at 2355.12,2120 h30 r90
  text "GND" at 1999.02,2119.09 h30 r90
  text "P4.0 / SPI_CS_Mem" at 2051.46,2119.09 h30 r90
  text "P4.1 / SPI_MOSI" at 2155.12,2119.09 h30 r90
  text "P4.3 / SPI_CLK" at 2210,2119.09 h30 r90
  text "VIN_Charge" at 3397.64,1737.2 h30
  text "Vbatt" at 3397.64,1626.97 h30
  text "GND" at 3400,1450 h30
  text "VRECT" at 3397.64,1330.71 h30
  text "EN_VREG" at 3397.64,1210.63 h30
  text "RX_Wakeup" at 3397.64,1084.65 h30
  text "GND" at 3395,600 h30
  text "TX" at 3395,479.07 h30
  text "Bitline_LPF" at 3395,363.13 h30
  text "Bitline" at 3395,237.2 h30
  text "P1.6 / ACCEL_INT2" at 1840,-61.93 h30 r270
  text "P6.3 / SPI_CS_ACCEL" at 1890.33,-61.93 h30 r270
  text "P1.7 / ACCEL_INT1" at 1940.67,-61.93 h30 r270
  text "P1.5 / Batt_Full" at 1991,-61.93 h30 r270
  text "P1.4 / EPD_PWM" at 2041.33,-61.93 h30 r270
  text "P1.3 / RX" at 2086.67,-61.93 h30 r270
  text "P1.2 / RX_WakeUp" at 2147,-61.93 h30 r270
  text "P1.1 / SW2" at 2187.33,-61.93 h30 r270
  text "GND" at 2237.67,-61.93 h30 r270
  text "P1.0 / SW1" at 2288,-61.93 h30 r270
  text "VReg" at 2348.33,-61.93 h30 r270
  text "P5.1 / LED2" at 2388.67,-61.93 h30 r270
  text "Vrect" at 2439,-61.93 h30 r270
  text "P5.0 / BATT_MEAS_ENABLE" at 2494.33,-61.93 h30 r270
  text "P6.2 / BATT_MEAS" at 2544.66,-61.93 h30 r270
  text "GND" at 2590,-61.93 h30 r270
  text "RX" at 2835.63,-66.93 h30 r270
  text "RX_Enable" at 2948.33,-66.93 h30 r270
  text "RX_WakeUp_Enable" at 3061.02,-66.93 h30 r270
Mechanical 2:
  circle w5: c3284.21,1108.06 r30
  circle w10: c0,0 r50
  circle w10: c0,0 r50
  lines w3.94: 2033.66,1644.04 2053.66,1644.04 ; 2053.66,1624.04 2053.66,1644.04 ; 2053.66,1664.04 2053.66,1644.04 ; 2053.66,1904.04 2073.66,1904.04 ; 2073.66,1644.04 2053.66,1644.04 ; 2073.66,1884.04 2073.66,1904.04 ; 2073.66,1924.04 2073.66,1904.04 ; 2093.66,1904.04 2073.66,1904.04
  lines w5: 2433.29,1287.26 2483.29,1287.26 ; 2483.29,1237.26 2483.29,1287.26 ; 2483.29,1337.26 2483.29,1287.26
  lines w10: 0,0 0,100 0,0 ; 0,0 0,-100 0,0 ; 0,0 -100,0 100,0 0,0
Mechanical 3:
  rectangle: 3216.54,33.46 3334.65,2032.48
  rectangle: 2841.52,1915.35 2941.52,2065.35
  rectangle: 0,0 118.11,2086.61
  rectangle: 10.83,0.55 3340,118.66
  rectangle: 0,1968.5 3331.69,2086.61
  lines w10: 0,2086.61 1043.31,1043.31 ; 9.84,9.84 1043.54,1043.54 ; 25,150 150,25 ; 25,1850 150,1975 ; 50,175 175,50 ; 50,1825 175,1950 ; 56.1,1906.5 181.1,2031.5 ; 75,1800 200,1925 ; 78.74,196.36 203.74,71.36 ; 725.39,1025.59 1750.98,0 1750.98,2016.73 ; 787.4,1123.03 1750.98,2086.61 ; 2850,1900 cw(c2860,1900) 2860,1910 ; 2850,1900 cw(c2860,1900) 2860,1910 ; 2850,1900 cw(c2860,1900) 2860,1910 ; 2850,1900 2850,970 ccw(c2862.73,970) 2862.73,957.27 2910.61,957.27 ccw(c2912.73,975.93) 2931.38,973.81 2931.38,1900 ccw(c2921.38,1900) 2921.38,1910 2860,1910
Mechanical 13:
  text "U25" at 3093,1620 h20
Mechanical 15:
  lines w10: 0,118.11 0,1968.5 cw(c118.11,1968.5) 118.11,2086.61 3213.58,2086.61 ; 3332.68,118.11 3332.68,1968.5

## Text inside footprints (layer, text, board x,y; h text height)
B1: Bottom Overlay "-" at 2927.17,697.83 h60 r90; Bottom Overlay "+" at 3030,1538.31 h60 r90
U9: Bottom Overlay "o" at 2319.88,1578.74 h30 r90
U42: Mechanical 3 "routing in this area." at 2043.31,1384.84 h5 r180; Mechanical 3 "minimize traces" at 2043.31,1373.03 h5 r180; Mechanical 3 "Exposed floating pad:" at 2043.31,1361.22 h5 r180